# Altium PCB motherboard_2ch_arduino.PcbDoc
Units mm, origin at the board's own origin, x right, y up, seen from the top; angles counter-clockwise.
Board outline 155 x 100 mm, 2 copper layers (Top Layer, Bottom Layer); 52 components, 59 nets, 264 pads, 190 vias.
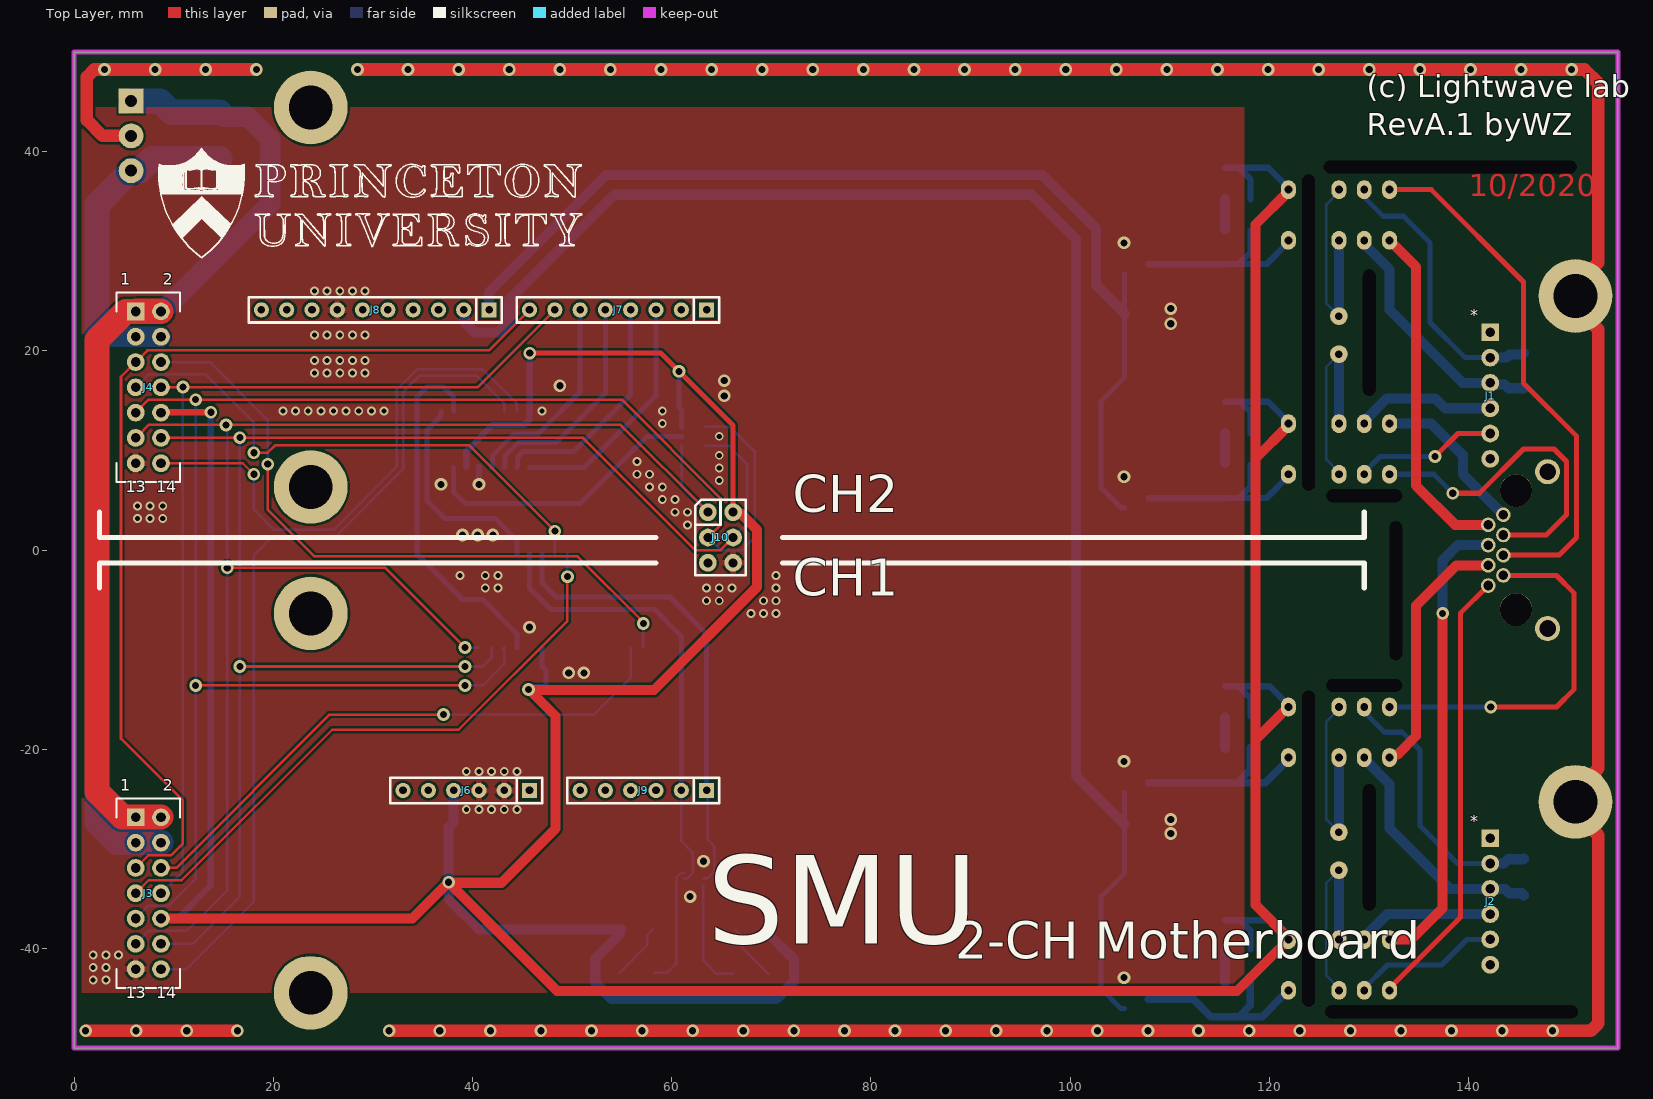
[diagram p0: Top Layer view]
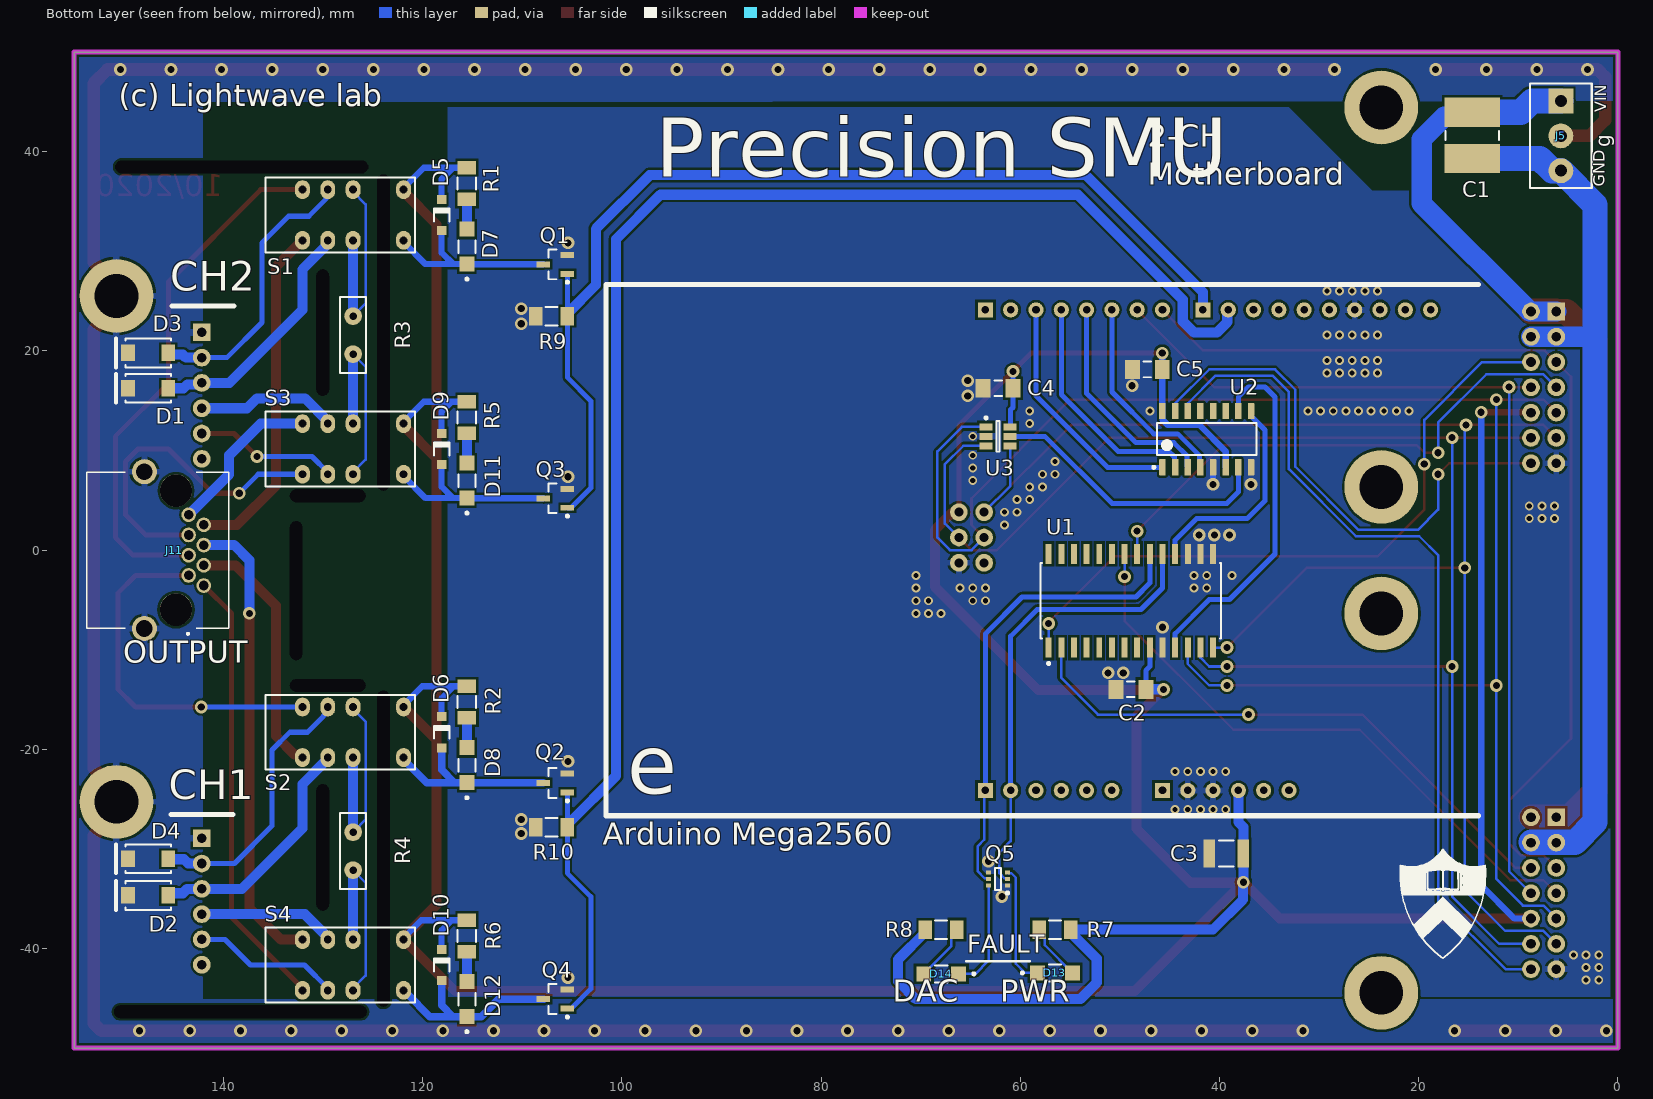
[diagram p1: Bottom Layer view, seen from below]
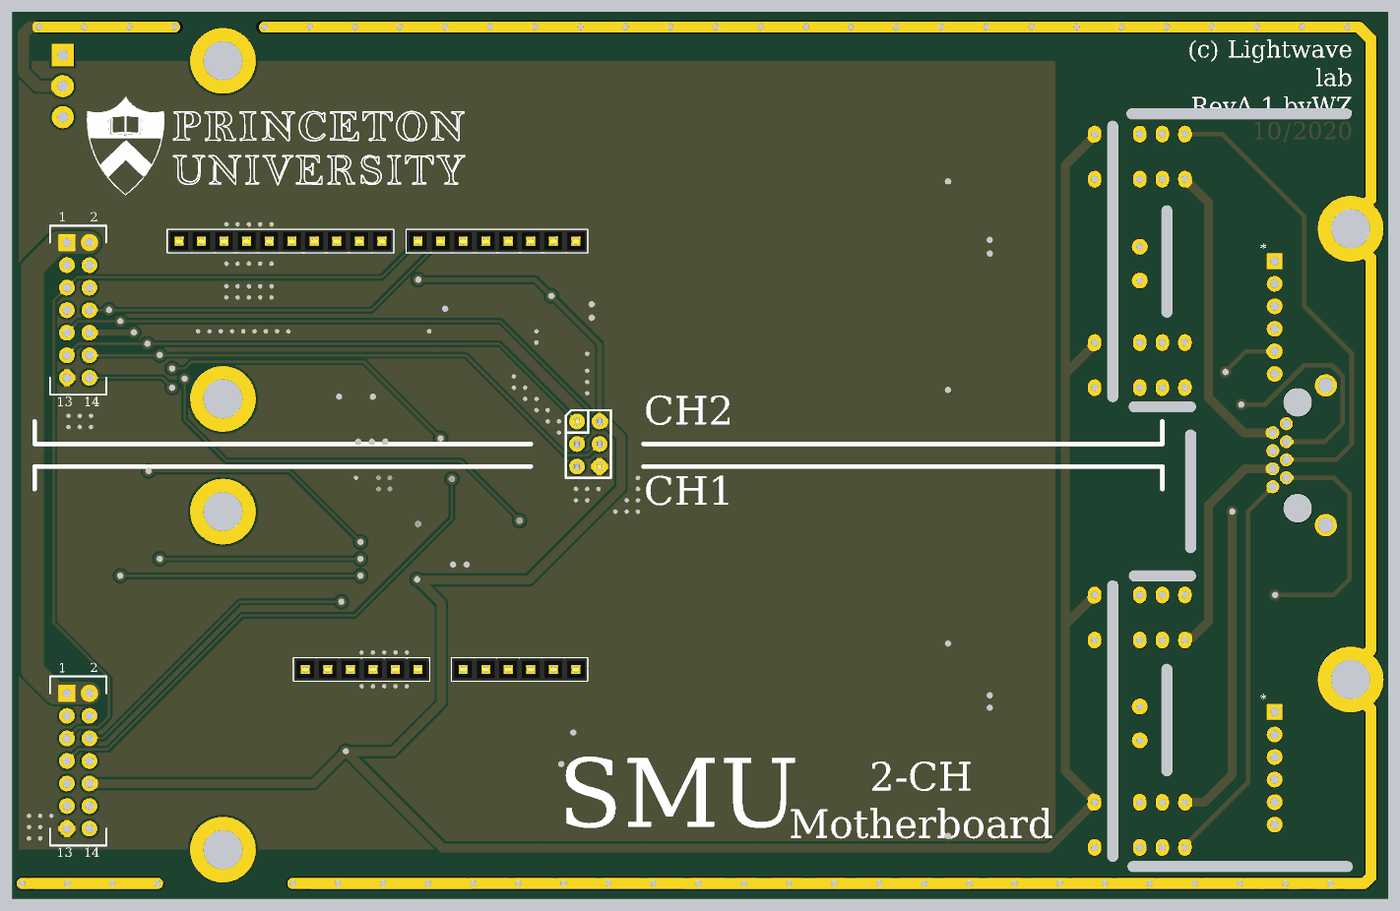
[diagram p2: 3D render of the assembled board from above, using the file's embedded part models]

## Layer stack, top to bottom
Top Solder: solder mask 0.0102, Solder Resist, Dk 3.5
Top Layer: signal copper 0.0356
Dielectric 1: dielectric 0.32, FR-4, Dk 4.8
Bottom Layer: signal copper 0.0356
Bottom Solder: solder mask 0.0102, Solder Resist, Dk 3.5

## Board outline
0,-50 0,50 155,50 155,-50

## Design rules (kind name [scope] priority, off if disabled: settings)
BoardOutlineClearance [All] p1: gap=0.381 ignorepadtopadclearanceinfootprint=FALSE
Clearance [All] p1: gap=0.152 ignorepadtopadclearanceinfootprint=FALSE except(0: Arc-Hole Track-Hole SMDPad-Hole THPad-Hole Via-Hole Fill-Hole Poly-Hole Region-Hole Text-Hole; 0.254: Track-Poly SMDPad-Poly THPad-Poly THPad-Region Via-Poly Fill-Poly Poly-Poly)
ComponentClearance [All] p1: gap=0.025 collisioncheckmode=3 verticalgap=0.025 showdistances=FALSE
DiffPairsRouting [All] p1: maxlimit=10 minlimit=0.152 mostfreqgap=0.203 toplayer_minwidth=0.152 toplayer_maxwidth=0.381 toplayer_prefwidth=0.203 bottomlayer_minwidth=0.152 bottomlayer_maxwidth=0.381 bottomlayer_prefwidth=0.203 maxuncoupledlength=12.7
HoleSize [All] p1: absolutevalues=TRUE maxlimit=6.731 minlimit=0.33 maxpercent=80.000 minpercent=20.000
HoleToHoleClearance [All] p1: gap=0.254 allowstackedmicrovias=FALSE
MinimumAnnularRing [All] p1: minimumring=0.178
MinimumSolderMaskSliver [All] p1: minsoldermaskwidth=0
PlaneClearance [All] p1: clearance=0.254
PlaneConnect [All] p1: planeconnectstyle=Direct reliefexpansion=0.406 reliefentries=4 reliefconductorwidth=0.152 reliefairgap=0.152
PolygonConnect [All] p1: thpad.connectstyle=Relief thpad.reliefconductorwidth=0.635 thpad.reliefentries=4 thpad.polygonreliefangle="90 Angle" thpad.airgapwidth=0.254 smdpad.connectstyle=Direct smdpad.reliefconductorwidth=0.203 smdpad.reliefentries=4 smdpad.polygonreliefangle="90 Angle" smdpad.airgapwidth=0.152 via.connectstyle=Direct via.reliefconductorwidth=0.203 via.reliefentries=4 via.polygonreliefangle="90 Angle" via.airgapwidth=0.152
RoutingCorners [All] p1: cornerstyle=45-Degree minsetback=1.25 maxsetback=1.25
RoutingVias [All] p1: holewidth=0.381 width=0.762 viastyle="Through Hole" minholewidth=0.33 minwidth=0.686 maxholewidth=2.54 maxwidth=2.896
SilkToSilkClearance [All] p1: silktosilkclearance=0
SilkToSolderMaskClearance [IsPad] p1: minsilkscreentomaskgap=0.152 clearancetoexposedcopper=TRUE
SolderMaskExpansion [All] p1: expansion=0.075 istentingtop=FALSE
Width [All] p1: maxlimit=10.16 minlimit=0.152 preferedwidth=0.203
20 further rules are at their usual default settings.

## Components (designator, comment, footprint, x,y, rotation, side; value= is the part's Value field where it differs from the comment)
C1 "KRM55TR71H226MH01L" CAPC6050X50M 14.605,41.656 r90 bottom
C2 "C1206C104J3GACAUTO" FP-C1206C-EB-IPC_A 48.895,-13.97 r180 bottom value="0.10 μF"
C3 "1210YD107MAT2A" MURA-1210_H_2.7_M 39.319,-30.48 r180 bottom
C4 "C1206C104J3GACAUTO" FP-C1206C-EB-IPC_A 62.23,16.256 r0 bottom value="0.10 μF"
C5 "C1206C104J3GACAUTO" FP-C1206C-EB-IPC_A 47.244,18.161 r180 bottom value="0.10 μF"
D1 "SMAJ33CA-TR" STM-SMA-2_V 147.574,16.256 r0 bottom
D2 "SMAJ33CA-TR" STM-SMA-2_V 147.574,-34.671 r0 bottom
D3 "SMAJ33CA-TR" STM-SMA-2_V 147.574,19.812 r0 bottom
D4 "SMAJ33CA-TR" STM-SMA-2_V 147.574,-30.988 r0 bottom
D5 "1N4148W-7-F" DIOD-SOD123-2_V 118.11,33.655 r90 bottom
D6 "1N4148W-7-F" DIOD-SOD123-2_V 118.11,-18.288 r90 bottom
D7 "LTST-C150KGKT" FP-LTST-C150KGKT-MFG 115.57,30.48 r90 bottom
D8 "LTST-C150KGKT" FP-LTST-C150KGKT-MFG 115.57,-21.59 r90 bottom
D9 "1N4148W-7-F" DIOD-SOD123-2_V 118.11,10.16 r90 bottom
D10 "1N4148W-7-F" DIOD-SOD123-2_V 118.11,-41.656 r90 bottom
D11 "LTST-C150KGKT" FP-LTST-C150KGKT-MFG 115.57,6.985 r90 bottom
D12 "LTST-C150KGKT" FP-LTST-C150KGKT-MFG 115.57,-45.085 r90 bottom
D13 "LTST-C150KGKT" FP-LTST-C150KGKT-MFG 56.515,-42.443 r180 bottom
D14 "LTST-C150KGKT" FP-LTST-C150KGKT-MFG 67.945,-42.545 r0 bottom
J1 "5-146276-6" SMUIO 142.19,21.87 r0 top locked
J2 "5-146276-6" SMUIO 142.19,-28.93 r0 top
J3 "5-146252-7" DATAIO 6.175,-26.833 r0 top locked
J4 "5-146252-7" DATAIO 6.175,23.967 r0 top locked
J5 "1984620" 1984620 5.715,41.6 r270 bottom
J6 "POWER" "Header 6x1 8.5mm" 45.72,-24.13 r180 top
J7 "IOL" "Header 8x1 8.5mm" 63.5,24.13 r180 top
J8 "IOH" "Header 10x1 8.5mm" 41.656,24.13 r180 top
J9 "AD" "Header 6x1 8.5mm" 63.5,-24.13 r180 top
J10 "ICSP" ICSP 63.627,3.81 r0 top
J11 "SS-60300-004" BEL_SS-60300-004 144.78,0 r270 bottom
Q1 "2N7002" INF-PG-SOT23_M 106.68,28.702 r0 bottom
Q2 "2N7002" INF-PG-SOT23_M 106.68,-23.368 r0 bottom
Q3 "2N7002" INF-PG-SOT23_M 106.68,5.207 r0 bottom
Q4 "2N7002" INF-PG-SOT23_M 106.68,-45.085 r0 bottom
Q5 "MBT3904DW1T1G" ONSC-SOT-363-6-419B-02_W_V 62.23,-33.02 r0 bottom
R1 "RN73R2BTTD1001B25" FP-RC3216-IPC_A 115.57,36.83 r90 bottom
R2 "RC3216J102CS" FP-RC3216-IPC_A 115.57,-15.24 r90 bottom
R3 "Y1453500R000V9L" Y1453500R000V9L 127,21.59 r90 bottom
R4 "Y1453500R000V9L" Y1453500R000V9L 127,-30.226 r90 bottom
R5 "RC3216J102CS" FP-RC3216-IPC_A 115.57,13.335 r90 bottom
R6 "RC3216J102CS" FP-RC3216-IPC_A 115.57,-38.735 r90 bottom
R7 "RC3216J102CS" FP-RC3216-IPC_A 56.515,-38.1 r0 bottom
R8 "RC3216J102CS" FP-RC3216-IPC_A 67.945,-38.1 r0 bottom
R9 "RN73H2BTTD1002B10" FP-RC3216-IPC_A 107.061,23.495 r180 bottom
R10 "RN73H2BTTD1002B10" FP-RC3216-IPC_A 107.061,-27.813 r180 bottom
S1 "G6S-2 DC5" EE2-5NU 128.27,33.655 r0 bottom
S2 "G6S-2 DC5" EE2-5NU 128.27,-18.288 r0 bottom
S3 "G6S-2 DC5" EE2-5NU 128.27,10.16 r0 bottom
S4 "G6S-2 DC5" EE2-5NU 128.27,-41.656 r0 bottom
U1 "MCP23S17T-E/SO" FP-C04-052-MFG 48.895,-5.08 r90 bottom
U2 "CD74HC138M" D0016A_M 41.275,11.145 r90 bottom
U3 "25AA02E48T-I/OT" SOT-23-OT6_M 62.23,11.43 r180 bottom

## Footprints (in the part's own frame and the unit in brackets; to place one, negate y for a bottom-side part, rotate by r counter-clockwise, add the part's x,y. Pads: shape width x height; smd on the part's side, far side on the other; paste and mask are expansions set on the pad)
1984620 [mm]
  rect 2.5x2.5 hole 1.2: 1(-3.5,0)
  round 2.5 hole 1.2: 2(0,0) 3(3.5,0)
  silkscreen extent -5.25,-3.1 5.25,3.1
BEL_SS-60300-004 [mil]
  round 58 hole 38: 1(100,50) 2(140,110) 3(60,110) 4(-20,110) 5(20,50) 6(-60,50) 7(-140,50) 8(-100,110)
  round 99 hole 66: S1(-310,-125) S2(310,-125)
  round 128 hole 128 unplated: ""(-235,0) ""(235,0)
  silkscreen extent -308,-353 335,208
CAPC6050X50M [mm] "Chip Capacitor, 2-Leads, Body 6.00x5.00mm, IPC Low Density"
  rect 2.95x5.6 smd: 1(-2.325,0) 2(2.325,0)
  silkscreen extent -0.45,-2.7 0.45,2.7, body extent -3.25,-2.75 3.25,2.75, height 5
D0016A_M [mm] "SOIC, 16-Leads, Body 10x4mm, Pitch 1.27mm, IPC Low Density"
  rrect15% 1.65x0.65 smd: 1(-2.825,4.445) 2(-2.825,3.175) 3(-2.825,1.905) 4(-2.825,0.635) 5(-2.825,-0.635) 6(-2.825,-1.905) 7(-2.825,-3.175) 8(-2.825,-4.445) 9(2.825,-4.445) 10(2.825,-3.175) 11(2.825,-1.905) 12(2.825,-0.635) 13(2.825,0.635) 14(2.825,1.905) 15(2.825,3.175) 16(2.825,4.445)
  silkscreen extent -2.95,-5 1.6,5.45, body extent -3,-4.95 3,4.95, height 1.59
DATAIO [mil]
  rect 70x70 hole 38: 1(0,0)
  round 70 hole 38: 2(100,0) 3(0,-100) 4(100,-100) 5(0,-200) 6(100,-200) 7(0,-300) 8(100,-300) 9(0,-400) 10(100,-400) 11(0,-500) 12(100,-500) 13(0,-600) 14(100,-600)
  silkscreen extent -75,-675 175,75
DIOD-SOD123-2_V [mm] "SOD123, 2-Leads, Body 2.7x1.55mm, Height 1.45mm"
  rect 0.9x0.95 smd: 1(-1.575,0) 2(1.575,0)
  silkscreen extent -0.64,-0.83 0.64,0.77, body extent -1.35,-0.77 1.35,0.77, height 1.45
EE2-5NU [mm]
  oval 1.5x1.9 hole 0.8: 1(-6.35,2.54) 3(-1.27,2.54) 4(1.27,2.54) 5(3.81,2.54) 8(3.81,-2.54) 9(1.27,-2.54) 10(-1.27,-2.54) 12(-6.35,-2.54)
  silkscreen extent -7.5,-3.75 7.5,3.75, body extent -7.5,-3.75 7.5,3.75, height 9.4
FP-C04-052-MFG [mm]
  rect 2x0.6 smd paste+0 mask+0: 1(-4.7,8.255) 2(-4.7,6.985) 3(-4.7,5.715) 4(-4.7,4.445) 5(-4.7,3.175) 6(-4.7,1.905) 7(-4.7,0.635) 8(-4.7,-0.635) 9(-4.7,-1.905) 10(-4.7,-3.175) 11(-4.7,-4.445) 12(-4.7,-5.715) 13(-4.7,-6.985) 14(-4.7,-8.255) 15(4.7,-8.255) 16(4.7,-6.985) 17(4.7,-5.715) 18(4.7,-4.445) 19(4.7,-3.175) 20(4.7,-1.905) 21(4.7,-0.635) 22(4.7,0.635) 23(4.7,1.905) 24(4.7,3.175) 25(4.7,4.445) 26(4.7,5.715) 27(4.7,6.985) 28(4.7,8.255)
  silkscreen extent -6.42,-9.05 3.8,9.05, body extent -3.8,-9.05 3.8,9.05, height 2.65
FP-C1206C-EB-IPC_A [mm]
  rect 1.505x1.906 smd paste+0 mask+0: 1(-1.501,0) 2(1.501,0)
  silkscreen extent -0.37,-0.8 0.37,0.8, body extent -1.6,-0.8 1.6,0.8, height 0.88
FP-LTST-C150KGKT-MFG [mm]
  rect 1.5x1.5 smd paste+0 mask+0: 1(-1.75,0) 2(1.75,0)
  silkscreen extent -3.4,-0.85 0.63,0.85, body extent -1.6,-0.8 1.6,0.8, height 1.1
FP-RC3216-IPC_A [mm]
  rect 1.355x1.858 smd paste+0 mask+0: 1(-1.576,0) 2(1.576,0)
  silkscreen extent -0.6,-0.93 0.6,0.93, body extent -1.6,-0.8 1.6,0.8, height 0.65
"Header 6x1 8.5mm" [mil] "Stackable 6 pin header"
  rect 60x60 hole 30: 1(0,0)
  round 60 hole 30: 2(100,0) 3(200,0) 4(300,0) 5(400,0) 6(500,0)
  silkscreen extent -50,-50 550,50, body extent -50,-50 550,50, height 335
"Header 8x1 8.5mm" [mil] "Stackable 8 pin header"
  rect 60x60 hole 30: 1(0,0)
  round 60 hole 30: 2(100,0) 3(200,0) 4(300,0) 5(400,0) 6(500,0) 7(600,0) 8(700,0)
  silkscreen extent -50,-50 750,50, body extent -50,-50 750,50, height 335
"Header 10x1 8.5mm" [mil] "Stackable 10 pin header"
  rect 60x60 hole 30: 1(0,0)
  round 60 hole 30: 2(100,0) 3(200,0) 4(300,0) 5(400,0) 6(500,0) 7(600,0) 8(700,0) 9(800,0) 10(900,0)
  silkscreen extent -50,-50 950,50, body extent -50,-50 950,50, height 335
ICSP [mil]
  round 70 hole 35.43: 1(0,0) 2(100,0) 3(0,-100) 4(100,-100) 5(0,-200) 6(100,-200)
  silkscreen extent -50,-250 150,50, body extent -50,-250 150,50, height 485
INF-PG-SOT23_M [mm] "SOT23, 3-Leads, Body 2.9x1.3mm, Pitch 0.95mm, IPC Low Density"
  rect 1.35x0.6 smd: 1(-1.2,0.95) 2(-1.2,-0.95) 3(1.2,0)
  silkscreen extent -1.32,-1.5 0.7,1.92, body extent -0.7,-1.5 0.7,1.5, height 1.1
MURA-1210_H_2.7_M [mm] "Chip Capacitor, 2-Leads, Body 3.5x2.7mm, IPC Low Density"
  rect 1.15x2.8 smd: 1(-1.725,0) 2(1.725,0)
  silkscreen extent -0.75,-1.3 0.75,1.3, body extent -1.75,-1.35 1.75,1.35, height 2.7
ONSC-SOT-363-6-419B-02_W_V [mm] "SOT23, 6-Leads, Body 2x1.25mm, Pitch 0.65mm"
  rect 0.5x0.4 smd: 1(-0.95,0.65) 2(-0.95,0) 3(-0.95,-0.65) 4(0.95,-0.65) 5(0.95,0) 6(0.95,0.65)
  silkscreen extent -1.07,-1.1 0.3,1.52, body extent -0.63,-1 0.63,1, height 1.1
SMUIO [mil]
  rect 70x70 hole 38: 1(0,0)
  round 70 hole 38: 2(0,-100) 3(0,-200) 4(0,-300) 5(0,-400) 6(0,-500)
SOT-23-OT6_M [mm] "SOT23, 6-Leads, Body 2.9x1.7mm, Pitch 0.95mm, Lead Span 2.8mm, IPC Low Density"
  rect 1.3x0.7 smd: 1(-1.2,0.95) 2(-1.2,0) 3(-1.2,-0.95) 4(1.2,-0.95) 5(1.2,0) 6(1.2,0.95)
  silkscreen extent -1.33,-1.55 0.15,1.97, body extent -0.9,-1.55 0.9,1.55, height 1.45
STM-SMA-2_V [mm] "Diode, 2-Leads, Body 4.6x2.9mm"
  rect 1.4x1.64 smd: 1(-2.015,0) 2(2.015,0)
  silkscreen extent -2.3,-1.45 3.21,1.45, body extent -2.3,-1.45 2.3,1.45, height 2.59
Y1453500R000V9L [mil]
  round 70 hole 30: 1(-75,0) 2(75,0)
  silkscreen extent -150,-52 150,52, body extent -150,-53 150,53, height 325

## Part data
C1: library part CAP22uF
C2 C4 C5: library part CMP-03020-020888-1, "CAP CER 0.1UF 25V C0G/NP0 1206", Capacitance="0.10 μF", Manufacturer=KEMET, Package=C1206C-EB, Temperature="-55°C to +150°C", Temperature Characteristic=C0G, Temperature Coefficient=15%, Temperature Range High=+150°C, Temperature Range Low=-55°C, Tolerance=0.05, Voltage Rating="25 V", Automotive=Yes, Automotive Grade="Grade 0", Category=Cap, ComponentLink2Description=Datasheet, ComponentLink2URL=https://content.kemet.com/datasheets/KEM_C1007_X8R_ULTRA_150C_SMD.pdf, Device Class L1="Passive Components", Device Class L2=Capacitors, Device Class L3="Ceramic Capacitors", Digikey Description="CAP CER 0.1UF 25V C0G/NP0 1206", Height=0.88mm, Ipc Land Pattern Name=CAPC320160X78, Lead Free=Yes, Manufacturer Part Number=C1206C104J3GACAUTO, Material=Ceramic, Mouser Description="Multilayer Ceramic Capacitor, AEC-Q200 MLCC Series, 0.1 - F, - 5%, C0G / NP0, 25 V", Octopart=https://octopart.com/c1206c104j3gacauto-kemet-22570084, RoHS=TRUE
C3: library part CMP-2000-06362-1, "Cap Ceramic, 47 uF, +/- 10%, -55 to 85 degC, 2-Pin SMD (1210), RoHS, Tape and Reel", Capacitance=47µF, Manufacturer=Murata, Operating Temperature=-55°C~85°C, Package / Case=1210(3225Metric), Package Description="2-Pin Surface Mount Device, Body 3.2 x 2.5 mm", Package Reference=1210, Ratings=-, Standard Package=1, Temperature Coefficient=X5R, Tolerance=±10%, Voltage - Rated=16V, Applications=GeneralPurpose, Catalog Drawings=GRMSeries_1210_2.5, Category=Capacitors, Datasheet URL=http://psearch.en.murata.com/capacitor/product/GRM32ER61C476KE15%23.pdf, Datasheet Version=04/2016, Family=CeramicCapacitors, Features=-, Height - Seated (Max)=-, Lead Spacing=-, Lead Style=-, Manufacturer URL=http://www.murata.com/, Mounting Technology=SurfaceMount, Mounting Type=SurfaceMount,MLCC, Online Catalog=GRMSeries, Other Names=490-6539-6, Packaging=Digi-Reel®, Product Training Modules=High-CapMultilayerCeramicCapacitors, Series=GRM, Size / Dimension="0.126\"Lx0.098\"W(3.20mmx2.50mm)", Thickness (Max)="0.106\"(2.70mm)", Voltage Rating DC=16V
D1 D2 D3 D4: library part CMP-2000-05373-2, "Transil(TM) Diode, 33 A, 36.7 V, -55 to 150 degC, 2-Pin SMA, RoHS, Tape and Reel", Breakdown Voltage Min=36.7V, Clamping Voltage Vc Max=69.7V, Diode Case Style=DO-214AC, Manufacturer=STMicroelectronics, Package Description="2-Pin Surface Mount Device, Body 4.275 x 2.575 mm", Package Reference=SMA, Peak Pulse Current Ippm="7.5 /  / A", Peak Pulse Power Dissipation=400W, Power Dissipation Pd="400 /  / W", Reverse Stand-Off Voltage Vrwm=33V, Datasheet URL=http://www.st.com/st-web-ui/static/active/en/resource/technical/document/datasheet/CD00001333.pdf, Datasheet Version="Rev. 12, 07/2010", Manufacturer URL=http://www.st.com/, No. of Pins=2Pins, Package URL=http://www.st.com/st-web-ui/static/active/en/resource/technical/document/datasheet/CD00283518.pdf, Packaging=CutTape, Product Range=SMAJSeries, SVHC=NoSVHC(17-Dec-2015), TVS Polarity=Bidirectional
D5 D6 D9 D10: library part CMP-2000-04932-2, "Fast Switching Diode, 100 V, 0.15 A, -65 to 150 degC, 2-Pin?SOD123, RoHS, Tape and Reel", If - Forward Current=0.15A, Ir - Reverse Current=1uA, Manufacturer=DiodesIncorporated, Max Surge Current=2A, Maximum Operating Temperature=+150C, Minimum Operating Temperature=-65C, Operating Temperature Range=-65Cto+150C, Package / Case=SOD-123, Package Reference=SOD123-2, Peak Reverse Voltage=100V, Vf - Forward Voltage=1.25V, Brand=DiodesIncorporated, Configuration=Single, Datasheet URL=http://www.farnell.com/datasheets/1915529.pdf, Datasheet Version="Rev. 24-2, 10/2013", Factory Pack Quantity=3000, Height=1.25mm, Length=2.85mm, Manufacturer URL=http://www.diodes.com/, Mounting Style=SMD/SMT, Package URL=http://www.diodes.com/datasheets/ds18004.pdf, Packaging=Reel, Product=SwitchingDiodes, Product Category=Diodes-GeneralPurpose,Power,Switching, Recovery Time=4ns, RoHS=True, Series=1N4148, Type=SwitchingDiode, Unit Weight=0.000353oz, Width=1.7mm
D7 D8 D11 D12 D13 D14: library part CMP-22017-000010-1, "LED GREEN CLEAR 1206 SMD", Case Code (Imperial)=1206, Case Code (Metric)=3216, Color=Green, Forward Current=30mA, Forward Voltage=2V, Lens Color=Colorless, Max Operating Temperature=85°C, Min Operating Temperature=-55°C, Package Quantity=1, Power Dissipation=75mW, Reverse Voltage=5V, Test Current=20mA, Case/Package=1206, Depth=1.6mm, Dominant Wavelength=571nm, Height=1.1mm, Illumination Color=Green, Lead Free="Lead Free", Length=3.2mm, Lens Style=Diffused, Lens Transparency=Clear, Luminous Intensity=71mcd, Mount="Surface Mount", Number of Elements=1, Number of LEDs=1, Number of Pins=2, Packaging="Tape and Reel", Power Rating=75mW, Radiation Hardening=No, Viewing Angle=130°, Wavelength=574nm, Width=1.6mm
J1 J2: library part SMUIO
J3 J4: library part DATAIO
J5: library part POWERJACK
J6: Supplier Part Number 1=2699075, Supplier 1=Arrow, Supplier 2=Arrow, Supplier 3=Newark, Supplier 4=Digi-Key, Supplier Part Number 2=2699089, Supplier Part Number 3=11P8269, Supplier Part Number 4=SAM1198-06-ND
J7: Supplier Part Number 1=2698925, Supplier 1=Arrow, Supplier 2=Arrow, Supplier 3=Digi-Key, Supplier Part Number 2=2698940, Supplier Part Number 3=SAM1198-08-ND
J8: Supplier Part Number 1=2698789, Supplier 1=Arrow, Supplier 2=Arrow, Supplier 3=Digi-Key, Supplier Part Number 2=2698803S4475693N1004, Supplier Part Number 3=SAM1198-10-ND
J9: Supplier Part Number 1=52553843, Supplier 1=Arrow, Supplier 2=Arrow, Supplier 3=Digi-Key, Supplier 4=Newark, Supplier Part Number 2=2699089, Supplier Part Number 3=SAM1198-06-ND, Supplier Part Number 4=11P8269
J10: Supplier Part Number 1=SAM1185-03-ND, Supplier 1=Digi-Key, Supplier 2=Arrow, Supplier 3=Arrow, Supplier Part Number 2=2699340, Supplier Part Number 3=46091550
J11: "Modular Jack", Package="QFN-16 Stewart Connector", Availability=Unavailable, DigiKey-Purchase-URL=https://snapeda.com/shop?store=DigiKey&id=621521, MF="Stewart Connector", Mouser-Purchase-URL=https://snapeda.com/shop?store=Mouser&id=621521, MP=SS-60300-004, Price=None, SnapEDA_Link=https://www.snapeda.com/parts/SS-60300-004/Stewart%20Connector/view-part/621521/?ref=snap
Q1 Q2 Q3 Q4: library part CMP-1149-00026-1, "N-Channel OptiMOS Small-Signal-Transistor, 60 V VDS, 0.3 A ID, -55 to 150 degC, PG-SOT23, Reel, Green", Manufacturer=Infineon, ComponentLink1Description="Manufacturer URL", ComponentLink1URL=http://www.infineon.com/, ComponentLink2Description=Datasheet, ComponentLink2URL=http://www.infineon.com/dgdl/2N7002_Rev2.4.pdf?folderId=db3a3043156fd573011622e10b5c1f67&fileId=db3a304319bc939a0119c2a9461e79e6, ComponentLink3Description="Package Specification", ComponentLink3URL=http://www.infineon.com/dgdl/SOT23-Package_Overview.pdf?folderId=db3a30431936bc4b0119532290053c66&fileId=db3a30431936bc4b0119533468123c85, DatasheetVersion="Rev. 2.4", Green=TRUE, Halogen-free=TRUE, ID (max)="0.3Â A", IDpuls (max)="1.2Â A", Mounting Technology="Surface Mount", PackageDescription="3-Pin Small Outline Transistor Package, 2.9 x 1.3 mm Body, 0.95 mm Pitch", PackageReference=PG-SOT23, PackageVersion=Apr-08, Packing=Reel, PartNumber=2N7002, Ptot (max)="0.5Â W", QG="0.4Â nC", RDS (on) (max)="3,000 mOhm", RDS (on) (max) (@4.5V)="4,000 mOhm", RthJA (max)="250 K/W", VDS (max)="60 V", VGS(th) (max)="2.5Â V", VGS(th) (min)="1.5Â V"
Q5: library part CMP-1048-00877-1, "Dual General Purpose Transistors, 6-Pin SOT-363, Pb-Free, Tape and Reel", Manufacturer="On Semiconductor", ComponentLink1Description="Manufacturer URL", ComponentLink1URL=http://www.onsemi.com/, ComponentLink2Description=Datasheet, ComponentLink2URL=http://www.onsemi.com/pub_link/Collateral/MBT3904DW1T1-D.PDF, ComponentLink3Description="Package Specification", ComponentLink3URL=http://www.onsemi.com/pub_link/Collateral/NTJD4001N-D.PDF, DatasheetVersion="Rev. 9", fT Min (MHz)=300, IC Continuous (A)=0.2, Mounting Technology="Surface Mount", PackageDescription="6-Pin Small Outline Transistor, Body 2 x 1.25 mm, Pitch 0.65 mm", PackageReference=SOT-363-6-419B-02_W, PackageVersion="Rev. W, 01/2006", Packing="Tape and Reel", PartNumber=MBT3904DW1T1G, Polarity="Dual NPN", RoHS=TRUE
R1 R2 R5 R6 R7 R8: library part CMP-13261-001932-1, "Res Thick Film 1206 1kΩ 5% 0.25W ±100ppm/°C Molded SMD T/R", Case Code (Imperial)=1206, Case Code (Metric)=3216, Max Operating Temperature=155°C, Max Power Dissipation=250mW, Min Operating Temperature=-55°C, Resistance=1kR, Temperature Coefficient=100ppm/°C, Tolerance=5%, Voltage Rating (DC)=200V, Case/Package=1206, Composition="Thick Film", Contact Plating=Tin, Depth=1.6mm, Features="Moisture Resistant", Height=0.026inch, Lead Free="Lead Free", Length=0.126inch, Military Standard=Not, Number of Terminations=2, Packaging="Tape and Reel", Power Rating=250mW, Radiation Hardening=No, Width=0.063inch
R9 R10: library part CMP-13261-000768-1, "RES SMD 10K OHM 1% 1/4W 1206", Case Code (Imperial)=1206, Case Code (Metric)=3216, Max Operating Temperature=155°C, Max Power Dissipation=250mW, Min Operating Temperature=-55°C, Resistance=10kR, Temperature Coefficient=100ppm/°C, Tolerance=1%, Voltage Rating (DC)=200V, Case/Package=1206, Composition="Thick Film", Contact Plating=Tin, Depth=1.6mm, Features="Moisture Resistant", Height=0.026inch, Lead Free="Lead Free", Length=0.126inch, Military Standard=Not, Number of Terminations=2, Packaging="Tape and Reel", Radiation Hardening=No, Width=0.063inch
S1 S2 S3 S4: library part EE2-5NU
U1: library part CMP-06293-000003-1, "IC I/O EXPANDER SPI 16B 28SOIC", Case/Package=SOIC, Frequency=10MHz, Max Operating Temperature=125°C, Max Supply Voltage=5.5V, Min Operating Temperature=-40°C, Min Supply Voltage=4.5V, Nominal Supply Current=1mA, Package Quantity=1600, Power Dissipation=700mW, Interface=SPI, Lead Free="Lead Free", Max Frequency=10MHz, Mount="Surface Mount", Number of Bits=16, Number Of Channels=1, Number of I/Os=16, Number of Pins=28, Packaging="Tape and Reel", REACH SVHC="No SVHC"
U2: library part CMP-1633-00149-2, "High Speed CMOS Logic 3-to-8 Line Decoder Demultiplexer Inverting and Non-Inverting, D0016A, TUBE", F @ Nom Voltage(Max)(Mhz)=28, Generic Part Number=CD74HC138, ICC @ Nom Voltage(Max)(mA)=0.08, Manufacturer="Texas Instruments", Operating Temperature Range(C)="-55 to 125", Rating=Catalog, tpd @ Nom Voltage(Max)(ns)=30, Voltage(Nom)(V)=3.3,5, Bits(#)=8, Channels(#)=1, Code_JEDEC="MS-012 variation AC", Configuration=3：8, DatasheetVersion=SCHS147I, Function=Decoder/Demultiplexer, Input Type=LVTTL/CMOS, Output Drive (IOL/IOH)(Max)(mA)=5.2/-5.2, Output Type=CMOS, PackageReference=D0016A, Schmitt Trigger=No, Technology Family=HC, Type=Standard, VCC(Max)(V)=6, VCC(Min)(V)=2
U3: library part CMP-0165-00270-1, "2K SPI Bus Serial EEPROM with EUI-48 Node Identity, 6-Pin SOT-23, Industrial Temperature, Tape and Reel", Code_IPC=SOT26A-6, DatasheetVersion="revA, Dec-2008", PackageDescription="6-Lead Plastic Small Outline Transistor (OT) [SOT-23]", PackageReference=SOT-23-OT6, PackageVersion="revBB, Aug-2009"

## Free pads (board coordinates)
  round 7.4 hole 4.4 unplated: ""(23.749,-44.45) ""(23.749,-6.35) ""(23.749,6.35) ""(23.749,44.45)
  round 0 hole 1.27 slot 31.75 at 90 deg unplated: ""(123.952,-29.972) ""(123.952,21.844)
  round 0 hole 1.27 slot 7.62 at 0 deg unplated: ""(129.54,-13.589) ""(129.54,5.461)
  round 0 hole 1.27 slot 12.7 at 90 deg unplated: ""(130.048,-29.845) ""(130.048,21.844)
  round 0 hole 1.27 slot 13.97 at 90 deg unplated: ""(132.715,-4.064)
  round 0 hole 1.27 slot 25.4 at 0 deg unplated: ""(138.176,38.481) ""(138.303,-46.355)
  round 7.4 hole 4.4: ""(150.749,-25.273) ""(150.749,25.527)

## Via types
v1: diameter 0.889, hole 0.508, Top Layer to Bottom Layer, tented both sides, 86 vias
v2: diameter 1.27, hole 0.711, Top Layer to Bottom Layer, 57 vias
v3: diameter 1.27, hole 0.711, Top Layer to Bottom Layer, tented both sides, 47 vias

## Nets (pads, with @x,y where several pads share a name; then routed paths per layer and width w, separated by ;. In a path a pad name is that pad's centre, name@x,y a point inside that pad or via, vN(x,y) a via of type N, cw(c..) or ccw(c..) an arc to the next point about the centre after c; other vN are vias at no path point)
+5: C2.2 C3.2 C4.1 C5.2 D5.2 D6.2 D9.2 D10.2 J3.10 J4.10 J6.4 J10.2 R1.2 R2.2 R5.2 R6.2 R7.1 R8.2 S1.12 S2.12 S3.12 S4.12 U1.9 U2.6 U2.16 U3.6 | length 499.3
  Top Layer w0.508: J4.10 J4.10@8.751,13.843 ; v3(45.745,19.787) 58.903,19.787 v3(60.731,17.958) 66.167,12.522 J10.2
  Top Layer w0.635: J4.10@8.751,13.843 v3(13.716,13.843)
  Top Layer w1.016: J3.10 33.949,-36.993 37.567,-33.376 37.592,-33.376 v3(37.592,-33.35) v3@37.641,-33.399 ; v3(45.618,-13.995) 45.667,-14.044 v3@45.718,-14.044 ; J10.2 66.313,3.664 66.948,3.664 68.58,2.032 68.58,-3.683 58.219,-14.044 v3@45.718,-14.044 ; S2.12 121.92,-15.817 121.547,-16.19 121.478,-16.19 118.618,-19.05 ; S3.12 121.92,12.5 118.618,9.198 ; S1.12 121.92,35.995 118.618,32.693 118.618,9.198 ; v3@37.641,-33.399 48.507,-44.265 116.771,-44.265 121.627,-39.409 121.696,-39.409 121.92,-39.185 S4.12 121.92,-38.916 118.618,-35.614 118.618,-19.05 ; v3@37.641,-33.399 42.903,-33.399 48.336,-27.965 48.336,-16.662 v3@45.718,-14.044 ; 118.618,-19.05 118.618,9.198
  Bottom Layer w0.508: U1.9 46.99,-11.684 47.396,-12.09 47.396,-13.968 C2.2 ; v3(60.731,17.958) 60.731,16.258 C4.1 60.729,14.328 60.96,14.097 60.96,12.476 61.03,12.406 U3.6
  Bottom Layer w0.635: J3.10 10.378,-36.993 13.716,-33.655 v3(13.716,13.843) ; U2.6 39.37,9.906 42.037,12.573 45.212,12.573 45.72,13.081 U2.16 45.728,13.978 45.728,19.769 v3(45.745,19.787) ; R6.2 117.094,-37.159 ; R2.2 116.915,-13.664 ; R5.2 117.094,14.911 ; R1.2 116.967,38.406 ; D10.2 118.11,-38.175 117.094,-37.159 ; D6.2 118.11,-14.859 116.915,-13.664 ; D9.2 118.11,13.895 117.094,14.911 ; D5.2 118.11,37.263 116.967,38.406 ; S4.12 121.92,-38.916 120.163,-37.159 117.094,-37.159 ; S2.12 121.92,-15.548 120.036,-13.664 116.915,-13.664 ; S3.12 121.92,12.9 119.909,14.911 117.094,14.911 ; S1.12 121.92,36.395 119.909,38.406 116.967,38.406
  Bottom Layer w1.016: v3(37.592,-33.35) 37.641,-33.399 37.641,-35.101 40.64,-38.1 R7.1 54.77,-38.269 54.77,-38.575 52.324,-41.021 52.324,-43.434 53.975,-45.085 70.485,-45.085 72.263,-43.307 72.263,-41.094 69.521,-38.352 R8.2 ; v3@37.592,-33.313 37.592,-30.482 C3.2 ; C3.2@37.592,-30.427 37.592,-27.813 38.1,-27.305 J6.4 ; v3(45.618,-13.995) 45.618,-13.97 C2.2
BS: J7.6 U2.4 | length 20.9
  Bottom Layer w0.508: U2.4 41.981,8.391 41.981,9.469 44.196,11.684 46.609,11.684 50.8,15.875 J7.6
CS0: J7.3 U2.1 | length 24.3
  Bottom Layer w0.508: U2.1 51.246,8.32 58.42,15.494 J7.3
CS1: J7.4 U2.2 | length 23.5
  Bottom Layer w0.508: U2.2 44.521,8.391 44.521,9.342 45.085,9.906 50.165,9.906 55.88,15.621 J7.4
CS2: J7.5 U2.3 | length 22.3
  Bottom Layer w0.508: U2.3 43.251,8.391 43.251,9.469 44.577,10.795 48.387,10.795 53.34,15.748 J7.5
DADCS: J3.8 J4.8 J7.7 | length 94.5
  Top Layer w0.254: J4.8 40.477,16.347 J7.7
  Bottom Layer w0.254: J3.8 10.922,-32.246 v3(10.922,16.383)
DCLK: J3.9 J4.9 J10.3 U1.12 U3.1 | length 177.6
  Top Layer w0.254: J4.9 7.481,15.113 v3(12.192,15.113) 54.991,15.113 64.897,5.207 64.897,2.54 J10.3 ; v3(12.192,-13.589) v3(39.243,-13.589)
  Bottom Layer w0.254: J3.9 7.481,-35.687 9.525,-35.687 12.192,-33.02 v3(12.192,-13.589) v3(12.192,15.113) ; v3(39.243,-13.589) 41.021,-13.589 43.18,-11.43 43.18,-10.034 43.053,-9.907 U1.12 ; U3.1 65.852,12.38 68.326,9.906 68.326,1.27 67.056,0 64.897,0 J10.3
EARTH: D1.2 D2.2 D3.2 D4.2 J1.1 J2.1 J5.2 J11.S1 J11.S2 pad.@150.749,25.527 pad.@150.749,-25.273 | length 387.5
  Top Layer w0.508: v2(18.284,48.26) v2@18.49,48.26 ; v2@28.238,48.26 v2(28.444,48.26)
  Top Layer w1.27: v2(1.143,-48.26) v2(6.223,-48.26) v2(11.303,-48.26) v2(16.383,-48.26) ; J5.2 2.85,41.6 1.27,43.18 1.27,47.516 2.014,48.26 v2(3.044,48.26) v2(8.124,48.26) v2(13.204,48.26) v2(18.284,48.26) ; v2(28.444,48.26) v2(33.524,48.26) v2(38.604,48.26) v2(43.684,48.26) v2(48.764,48.26) v2(53.844,48.26) v2(58.924,48.26) v2(64.004,48.26) v2(69.084,48.26) v2(74.164,48.26) v2(79.244,48.26) v2(84.324,48.26) v2(89.404,48.26) v2(94.484,48.26) v2(99.564,48.26) v2(104.644,48.26) v2(109.724,48.26) v2(114.804,48.26) v2(119.884,48.26) v2(124.964,48.26) v2(130.044,48.26) v2(135.124,48.26) v2(140.204,48.26) v2(145.284,48.26) v2(150.364,48.26) 151.656,48.26 153.035,46.881 153.035,28.886 150.749,26.6 150.749,24.454 153.035,22.168 153.035,-21.914 150.749,-24.2 150.749,-26.346 153.035,-28.632 153.035,-47.516 152.291,-48.26 v2(148.463,-48.26) v2(143.383,-48.26) v2(138.303,-48.26) v2(133.223,-48.26) v2(128.143,-48.26) v2(123.063,-48.26) v2(117.983,-48.26) v2(112.903,-48.26) v2(107.823,-48.26) v2(102.743,-48.26) v2(97.663,-48.26) v2(92.583,-48.26) v2(87.503,-48.26) v2(82.423,-48.26) v2(77.343,-48.26) v2(72.263,-48.26) v2(67.183,-48.26) v2(62.103,-48.26) v2(57.023,-48.26) v2(51.943,-48.26) v2(46.863,-48.26) v2(41.783,-48.26) v2(36.703,-48.26) v2(31.623,-48.26)
FAULT1: J4.7 U1.21 | length 53.9
  Top Layer w0.254: v3(18.034,9.779) 19.431,9.779 20.193,10.541 39.624,10.541 v3(48.26,1.905)
  Bottom Layer w0.254: J4.7 7.481,17.653 13.208,17.653 18.034,12.827 v3(18.034,9.779) ; U1.21 v3(48.26,1.905)
FAULT2: J3.7 U1.22 | length 61.6
  Top Layer w0.254: J3.7 6.441,-34.453 6.441,-34.187 7.481,-33.147 10.795,-33.147 25.908,-18.034 38.608,-18.034 49.53,-7.112 v3(49.53,-2.667)
  Bottom Layer w0.254: v3(49.53,-2.667) U1.22
FAULTINT: J9.1 Q5.5 U1.20 | length 47.1
  Bottom Layer w0.254: Q5.5 63.253,-32.947 63.573,-32.947 64.262,-32.258 64.262,-29.718 63.627,-29.083 J9.1@63.627,-24.257
  Bottom Layer w0.508: U1.20 46.99,-3.302 48.387,-4.699 59.817,-4.699 63.5,-8.382 J9.1 J9.1@63.627,-24.257
GND: C2.1 C3.1 C4.2 C5.1 J3.13 J4.13 J6.2 J6.3 J8.7 J10.6 Q1.2 Q2.2 Q3.2 Q4.2 Q5.1 Q5.4 R9.1 R10.1 U1.10 U1.15 U1.16 U1.17 U2.5 U2.8 U3.2 | length 1.7
  Bottom Layer w0.635: v3(40.64,6.604) U2.5
  other v1: 1.905,-43.18 3.175,-43.18 1.905,-41.91 3.175,-41.91 1.905,-40.64 3.175,-40.64 4.445,-40.64 39.37,-26.035 40.64,-26.035 41.91,-26.035 43.18,-26.035 44.45,-26.035 39.37,-22.225 40.64,-22.225 41.91,-22.225 43.18,-22.225 44.45,-22.225 67.945,-6.35 69.215,-6.35 70.485,-6.35 63.5,-5.08 64.77,-5.08 69.215,-5.08 70.485,-5.08 41.275,-3.81 42.545,-3.81 63.5,-3.81 64.77,-3.81 66.04,-3.81 70.485,-3.81 38.735,-2.54 41.275,-2.54 42.545,-2.54 70.485,-2.54 61.595,2.54 6.35,3.175 7.62,3.175 8.89,3.175 60.325,3.81 61.595,3.81 6.35,4.445 7.62,4.445 8.89,4.445 59.055,5.08 60.325,5.08 57.785,6.35 59.055,6.35 64.77,6.985 56.515,7.62 57.785,7.62 64.77,8.255 56.515,8.89 64.77,9.525 64.77,11.43 59.055,12.7 20.955,13.97 22.225,13.97 23.495,13.97 24.765,13.97 26.035,13.97 27.305,13.97 28.575,13.97 29.845,13.97 31.115,13.97 46.99,13.97 59.055,13.97 24.13,17.78 25.4,17.78 26.67,17.78 27.94,17.78 29.21,17.78 24.13,19.05 25.4,19.05 26.67,19.05 27.94,19.05 29.21,19.05 24.13,21.59 25.4,21.59 26.67,21.59 27.94,21.59 29.21,21.59 24.13,26.035 25.4,26.035 26.67,26.035 27.94,26.035 29.21,26.035
  other v3: 105.41,-42.926 61.849,-34.798 63.195,-31.242 110.109,-28.448 110.109,-27.051 105.41,-21.209 49.657,-12.319 51.181,-12.319 45.72,-7.747 38.989,1.524 40.513,1.524 42.037,1.524 36.83,6.604 105.41,7.366 65.278,15.494 48.768,16.51 65.278,17.018 110.109,22.733 110.109,24.257 105.41,30.861
Hi_CH1: J11.3 S2.5 | length 26
  Top Layer w0.508: S2.5 S2.5@132.588,-20.828
  Top Layer w1.016: S2.5@132.304,-20.828 132.304,-20.535 132.881,-20.535 134.747,-18.669 134.747,-5.588 138.811,-1.524 J11.3
Hi_CH2: J11.8 S1.5 | length 34.7
  Top Layer w1.016: S1.5 132.08,31.046 132.453,30.673 132.522,30.673 134.747,28.448 134.747,6.477 138.684,2.54 J11.8
LDAC: J3.5 J4.5 J7.8 | length 99
  Top Layer w0.254: J3.5 7.435,-30.653 9.733,-30.653 10.922,-29.464 10.922,-25.146 4.699,-18.923 4.699,17.411 6.132,18.844 6.175,18.844 J4.5 7.354,20.066 41.656,20.066 J7.8
Lo_CH1: J11.4 S4.8 | length 46.8
  Top Layer w1.016: S4.8 134.239,-39.116 137.414,-35.941 v3(137.414,-6.35)
  Bottom Layer w1.016: v3(137.414,-6.35) 137.414,-1.016 138.938,0.508 J11.4
Lo_CH2: J11.7 S3.8 | length 16.3
  Bottom Layer w1.016: S3.8 136.271,12.7 139.446,9.525 139.446,7.62 J11.7
MemCS: U2.7 U3.5 | length 28.7
  Bottom Layer w0.508: U2.7 38.1,5.842 39.243,4.699 50.8,4.699 57.531,11.43 U3.5
MISO: J3.11 J4.11 J10.1 U1.14 U3.4 | length 156.8
  Top Layer w0.254: J4.11 6.441,11.267 6.441,11.533 7.481,12.573 v3(15.24,12.573) 54.864,12.573 J10.1 ; v3(15.367,-1.778) 31.242,-1.778 v3(39.243,-9.779)
  Bottom Layer w0.254: J4.11@5.933,11.025 5.933,11.267 J4.11 ; J3.11 7.481,-38.227 11.303,-38.227 15.367,-34.163 v3(15.367,-1.778) 15.367,12.446 v3(15.24,12.573) ; v3(39.243,-9.779) U1.14 U1.14 ; U3.4 61.03,6.407 J10.1
MONCS: U1.11 U2.10 | length 36.4
  Bottom Layer w0.508: U2.10 38.1,15.367 37.084,16.383 35.433,16.383 34.417,15.367 34.417,-0.381 38.989,-4.953 41.021,-4.953 44.45,-8.382 U1.11
MONRST: U1.18 U2.9 | length 21.6
  Bottom Layer w0.508: U2.9 36.83,13.47 35.433,12.073 35.433,4.953 37.211,3.175 42.291,3.175 44.45,1.016 U1.18
MOSI: J3.12 J4.12 J10.4 U1.13 U3.3 | length 158.1
  Top Layer w0.254: J4.12 51.09,11.267 62.357,0 64.897,0 J10.4 ; v3(16.637,-11.684) v3(39.243,-11.684)
  Bottom Layer w0.254: J3.12 11.902,-39.533 16.637,-34.798 v3(16.637,-11.684) v3(16.637,11.303) ; v3(39.243,-11.684) 41.021,-11.684 41.91,-10.795 U1.13 ; U3.3 65.72,10.48 67.564,8.636 67.564,2.667 J10.4
NetD1_1: D1.1 J1.3 S1.4 | length 24.8
  Bottom Layer w0.381: J1.3@142.012,16.79 J1.3
  Bottom Layer w1.016: S1.4 129.54,30.784 129.782,30.542 129.782,30.492 132.08,28.194 132.08,24.13 139.42,16.79 J1.3@142.012,16.79 ; J1.3 142.336,16.644 143.63,16.644 144.018,16.256 D1.1
NetD2_1: D2.1 J2.3 S2.4 | length 24.4
  Bottom Layer w1.016: S2.4 129.54,-20.955 132.08,-23.495 132.08,-27.94 138.15,-34.01 143.662,-34.01 144.107,-34.455 145.367,-34.455 145.559,-34.647 D2.1
NetD3_1: D3.1 J1.2 S1.9 | length 28.3
  Bottom Layer w0.508: S1.9 129.73,36.005 129.73,35.243 131.445,33.528 133.477,33.528 136.144,30.861 136.144,22.86 139.674,19.33 J1.2
  Bottom Layer w1.016: J1.2 143.79,19.33 144.094,19.634 145.381,19.634 D3.1
NetD4_1: D4.1 J2.2 S2.9 | length 27.5
  Bottom Layer w0.508: S2.9 129.54,-16.216 129.947,-16.624 129.947,-16.663 131.572,-18.288 133.35,-18.288 135.128,-20.066 135.128,-27.686 138.912,-31.47 J2.2
  Bottom Layer w1.016: J2.2 142.207,-31.453 143.553,-31.453 143.967,-31.039 145.508,-31.039 D4.1
NetD5_1: D5.1 D7.1 Q1.3 S1.1 | length 19
  Bottom Layer w0.635: Q1.3 115.542,28.702 D7.1 116.967,28.73 ; D5.1 118.11,29.873 116.967,28.73 ; S1.1 121.92,30.915 119.735,28.73 116.967,28.73
NetD6_1: D6.1 D8.1 Q2.3 S2.1 | length 19.2
  Bottom Layer w0.508: Q2.3 Q2.3@107.894,-23.354 ; D8.1@115.556,-23.354 D8.1
  Bottom Layer w0.762: Q2.3@107.894,-23.354 D8.1@115.556,-23.354 ; D8.1 116.84,-23.34 ; D6.1 118.11,-22.07 116.84,-23.34 ; S2.1 121.92,-21.028 119.608,-23.34 116.84,-23.34
NetD7_2: D7.2 R1.1 | length 3
  Bottom Layer w1.016: D7.2 R1.1
NetD8_2: D8.2 R2.1 | length 3
  Bottom Layer w1.016: D8.2 R2.1
NetD9_1: D9.1 D11.1 Q3.3 S3.1 | length 19
  Bottom Layer w0.635: Q3.3 107.894,5.221 115.556,5.221 D11.1 116.995,5.235 ; D9.1 118.11,6.35 116.995,5.235 ; S3.1 121.92,7.422 119.733,5.235 116.995,5.235
NetD10_1: D10.1 D12.1 Q4.3 S4.1 | length 19.9
  Bottom Layer w0.762: Q4.3 112.395,-45.085 114.145,-46.835 D12.1 116.995,-46.835 ; D10.1 118.11,-45.72 116.995,-46.835 ; S4.1@121.579,-44.537 119.281,-46.835 116.995,-46.835 ; S4.1@121.579,-44.537 S4.1
NetD11_2: D11.2 R5.1 | length 3
  Bottom Layer w1.016: D11.2 R5.1
NetD12_2: D12.2 R6.1 | length 3
  Bottom Layer w1.016: D12.2 R6.1
NetD13_1: D13.1 Q5.3 | length 12.2
  Bottom Layer w0.254: D13.1 59.538,-42.443 60.452,-41.529 60.452,-32.893 60.902,-32.443 61.207,-32.443 Q5.3
NetD13_2: D13.2 R7.2 | length 5.7
  Bottom Layer w0.254: D13.2 57.54,-39.668 57.54,-38.65 R7.2
NetD14_1: D14.1 Q5.6 | length 11.2
  Bottom Layer w0.254: Q5.6 63.119,-33.731 63.168,-33.731 63.18,-33.743 63.18,-41.209 64.516,-42.545 D14.1
NetD14_2: D14.2 R8.1 | length 5.9
  Bottom Layer w0.254: R8.1 66.92,-38.65 66.92,-39.742 69.072,-41.894 69.072,-41.922 D14.2 D14.2@69.723,-42.545
NetJ1_4: J1.4 S3.9 | length 14.3
  Bottom Layer w1.016: S3.9 129.54,12.954 131.826,15.24 136.652,15.24 137.642,14.25 J1.4
NetJ1_5: J1.5 S3.4 | length 14.6
  Top Layer w0.508: v3(136.652,9.398) 136.779,9.398 136.779,9.525 138.964,11.71 J1.5
  Bottom Layer w0.508: S3.4@129.54,7.747 129.54,7.82 131.118,9.398 v3(136.652,9.398)
  Bottom Layer w1.016: S3.4 S3.4@129.633,7.713 ; J1.5@142.164,11.684 J1.5
NetJ2_4: J2.4 S4.9 | length 13.9
  Bottom Layer w1.016: S4.9 129.54,-38.862 131.852,-36.55 J2.4
NetJ2_5: J2.5 S4.4 | length 14.9
  Bottom Layer w0.508: S4.4 129.54,-43.996 131.88,-41.656 137.287,-41.656 139.853,-39.09 J2.5
NetR3_1: R3.1 S3.3 S3.10 | length 20.1
  Bottom Layer w0.254: S3.3 127,7.82 125.73,9.09 125.73,18.415 R3.1
  Bottom Layer w1.016: S3.10 R3.1
NetR3_2: R3.2 S1.3 S1.10 | length 21.4
  Bottom Layer w0.254: R3.2 125.73,24.765 125.73,34.725 127,35.995 S1.10
  Bottom Layer w1.016: R3.2 S1.3
NetR4_1: R4.1 S4.3 S4.10 | length 20.1
  Bottom Layer w0.254: S4.3 127,-43.996 125.73,-42.726 125.73,-33.401 R4.1
  Bottom Layer w1.016: S4.10 R4.1
NetR4_2: R4.2 S2.3 S2.10 | length 21.2
  Bottom Layer w0.254: R4.2@126.873,-28.321 126.873,-28.194 125.73,-27.051 125.73,-17.218 127,-15.948 S2.10
  Bottom Layer w1.016: R4.2@126.873,-28.321 R4.2 S2.3
PGND: C1.1 J3.3 J3.4 J4.3 J4.4 J5.3 | length 89.9
  Bottom Layer w2.032: 2.286,21.463 2.322,21.427 J4.3 J4.4
  Bottom Layer w2.54: J3.4@8.679,-29.337 4.318,-29.337 2.286,-27.305 2.286,21.463 2.286,34.671 J5.3 6.604,38.1 7.835,39.331 C1.1
PGOOD1: J4.6 U1.1 | length 67.2
  Top Layer w0.254: v3(19.431,8.636) 19.431,4.064 24.13,-0.635 50.546,-0.635 57.15,-7.239 v3(57.15,-7.366)
  Bottom Layer w0.254: J4.6 8.715,18.844 8.794,18.923 8.83,18.887 13.625,18.887 19.431,13.081 v3(19.431,8.636) ; U1.1 v3(57.15,-7.366)
PGOOD2: J3.6 U1.2 | length 58.1
  Top Layer w0.254: J3.6 10.251,-31.913 25.654,-16.51 v3(37.084,-16.51)
  Bottom Layer w0.254: v3(37.084,-16.51) 52.197,-16.51 55.88,-12.827 U1.2
POWERINT: J9.2 Q5.2 U1.19 | length 46
  Bottom Layer w0.254: J9.2 60.96,-29.21 62.103,-30.353 62.103,-32.436 61.592,-32.947 61.353,-32.947 Q5.2
  Bottom Layer w0.508: U1.19 45.72,-3.81 47.879,-5.969 58.293,-5.969 60.96,-8.636 J9.2
RL_CH1: J8.1 Q1.1 Q3.1 R9.2 | length 105.2
  Bottom Layer w0.508: Q3.1 105.105,4.257 103.124,6.238 103.124,14.986 105.485,17.347 R9.2 ; R9.2@105.483,23.749 Q1.1@105.483,27.749
  Bottom Layer w0.762: R9.2@105.483,23.749 105.483,23.498 R9.2
  Bottom Layer w1.016: J8.1 41.656,25.908 53.406,37.658 97.216,37.658 102.616,32.258 102.616,26.616 R9.2@105.483,23.749
RL_CH2: J8.2 Q2.1 Q4.1 R10.2 | length 156.6
  Bottom Layer w0.508: Q4.1 105.105,-46.035 105.059,-45.989 103.124,-44.054 103.124,-34.798 105.485,-32.437 R10.2 105.483,-27.81 105.483,-27.559 105.483,-24.321 Q2.1
  Bottom Layer w1.016: J8.2 39.213,24.033 39.213,22.89 40.259,21.844 42.545,21.844 43.688,22.987 43.688,25.146 54.229,35.687 96.139,35.687 100.584,31.242 100.584,-22.66 105.316,-27.392 R10.2@105.483,-27.559
SHi_CH1: J11.1 S2.8 | length 37
  Top Layer w0.508: v3(142.24,-15.748) 148.844,-15.748 150.622,-13.97 150.622,-4.318 148.844,-2.54 J11.1
  Bottom Layer w0.508: S2.8 v3(142.24,-15.748) ; J11.1 J11.1@143.764,-2.54
SHi_CH2: J11.5 S1.8 | length 53.4
  Top Layer w0.508: S1.8 132.08,36.068 132.207,36.195 136.271,36.195 145.542,26.924 145.542,16.764 150.876,11.43 150.876,1.27 149.098,-0.508 J11.5
SLo_CH1: J11.2 S4.5 | length 44.7
  Top Layer w0.508: S4.5 132.461,-43.815 132.461,-43.615 139.192,-36.884 139.192,-6.35 J11.2
SLo_CH2: J11.6 S3.5 | length 33.5
  Top Layer w0.508: v3(138.43,5.715) 141.097,5.715 145.542,10.16 148.59,10.16 149.86,8.89 149.86,3.556 147.828,1.524 J11.6
  Bottom Layer w0.508: S3.5 136.525,7.62 v3(138.43,5.715)
SS_CH1: J4.14 U2.15 | length 54
  Top Layer w0.254: J4.14 16.927,8.727 v3(18.034,7.62)
  Bottom Layer w0.254: v3(18.034,7.62) 18.034,4.064 20.066,2.032 26.035,2.032 32.385,8.382 32.385,16.129 34.417,18.161 41.021,18.161 44.45,14.732 U2.15
SS_CH2: J3.14 U2.14 | length 86
  Bottom Layer w0.254: J3.14 11.267,-42.073 18.034,-35.306 18.034,-0.508 19.939,1.397 26.289,1.397 33.02,8.128 33.02,15.875 34.671,17.526 40.386,17.526 43.18,14.732 U2.14
VINP: C1.2 J3.1 J3.2 J4.1 J4.2 J5.1 | length 100.4
  Top Layer w2.54: J3.2@8.679,-26.797 4.826,-26.797 2.286,-24.257 2.286,21.082 5.171,23.967 J4.1 6.186,23.978 8.704,23.978 J4.2
  Bottom Layer w2.032: J4.1 J4.2 8.854,23.967 19.685,34.798 19.685,41.275 17.438,43.522 15.064,43.522 C1.2
  Bottom Layer w2.54: J5.1 8.621,45.1 9.74,43.981 C1.2
pads on no net: J1.6 J2.6 J6.1 J6.5 J6.6 J7.1 J7.2 J8.3 J8.4 J8.5 J8.6 J8.8 J8.9 J8.10 J9.3 J9.4 J9.5 J9.6 J10.5 J11. U1.3 U1.4 U1.5 U1.6 U1.7 U1.8 U1.23 U1.24 U1.25 U1.26 U1.27 U1.28 U2.11 U2.12 U2.13

## Polygon pours and split planes (outlines as drawn)
EARTH on Bottom Layer "EARTH_L02_P000" (solid, remove dead copper, pour order 0): 0,-45.085 142.113,-45.085 142.113,44.985 0,45.113 0,49.53 154.94,49.53 154.94,-49.53 0,-49.53
GND on Bottom Layer "GND_L02_P002" (solid, remove dead copper, pour order 2): 0.762,36.068 24.638,36.068 33.02,44.45 117.475,44.45 117.475,-44.831 0.762,-44.831
no net on Top Overlay (solid): 17.091,37.861 cw(c6.701,37.861) 16.867,35.717 8.711,35.717 cw(c18.834,37.836) 8.492,37.836 cw(c18.834,37.836) 8.531,38.74 ccw(c9.626,42.374) 9.626,38.579 ccw(c9.626,42.374) 9.627,38.579 ccw(c9.647,42.263) 9.647,38.579 ccw(c9.647,42.263) 12.792,40.343 ccw(c15.935,42.261) 15.935,38.579 ccw(c15.935,42.261) 15.956,38.579 ccw(c15.958,42.35) 15.958,38.579 ccw(c15.958,42.35) 17.053,38.741 cw(c6.701,37.861)
no net on Top Overlay (solid): 15.778,32.701 cw(c6.595,37.846) 14.838,31.3 12.821,33.262 10.81,31.305 cw(c19.24,37.972) 9.87,32.708 12.821,35.543
no net on Top Overlay (none): 16.849,35.63 16.855,35.659 16.861,35.688 16.867,35.717 16.865,35.717 ccw(c6.699,37.859) 17.051,38.739 cw(c15.956,42.348) 15.953,38.577 cw(c15.933,42.26) 12.789,40.341 cw(c9.645,42.261) 9.625,38.577 cw(c9.624,42.372) 8.529,38.738 ccw(c18.831,37.834) 8.709,35.715 8.712,35.715 ccw(c18.973,37.879) 9.836,32.732 9.835,32.731 ccw(c19.206,37.995) 10.775,31.328 ccw(c19.27,38.049) 12.787,29.371 ccw(c6.297,38.089) 14.802,31.323 14.803,31.322 ccw(c6.489,37.898) 15.627,32.527 ccw(c0.469,41.559) 15.85,32.913 ccw(c7.808,37.336) 16.502,34.392 ccw(c6.043,38.005) 16.837,35.572
no net on Bottom Overlay (solid): 21.871,-32.499 cw(c11.481,-32.499) 21.648,-34.643 13.492,-34.643 cw(c23.614,-32.524) 13.272,-32.524 cw(c23.614,-32.524) 13.312,-31.62 ccw(c14.407,-27.986) 14.407,-31.781 ccw(c14.407,-27.986) 14.408,-31.781 ccw(c14.428,-28.097) 14.428,-31.781 ccw(c14.428,-28.097) 17.573,-30.017 ccw(c20.716,-28.099) 20.716,-31.781 ccw(c20.716,-28.099) 20.736,-31.781 ccw(c20.739,-28.01) 20.739,-31.781 ccw(c20.739,-28.01) 21.834,-31.619 cw(c11.481,-32.499)
no net on Bottom Overlay (solid): 20.558,-37.659 cw(c11.376,-32.514) 19.619,-39.06 17.602,-37.098 15.591,-39.055 cw(c24.021,-32.388) 14.651,-37.652 17.602,-34.817
no net on Bottom Overlay (none): 21.63,-34.73 21.636,-34.701 21.641,-34.672 21.648,-34.643 21.645,-34.643 ccw(c11.479,-32.501) 21.831,-31.621 cw(c20.737,-28.012) 20.734,-31.783 cw(c20.713,-28.1) 17.57,-30.019 cw(c14.426,-28.099) 14.405,-31.783 cw(c14.405,-27.988) 13.309,-31.621 ccw(c23.612,-32.526) 13.489,-34.645 13.492,-34.645 ccw(c23.754,-32.481) 14.617,-37.628 14.616,-37.629 ccw(c23.986,-32.365) 15.556,-39.032 ccw(c24.05,-32.311) 17.568,-40.989 ccw(c11.078,-32.271) 19.583,-39.037 19.583,-39.038 ccw(c11.27,-32.462) 20.408,-37.833 ccw(c5.249,-28.801) 20.631,-37.447 ccw(c12.589,-33.024) 21.282,-35.968 ccw(c10.824,-32.355) 21.618,-34.788
GND on Top Layer "GND_L01_P001" (solid, remove dead copper, pour order 1): 0.762,44.45 117.475,44.45 117.475,-44.45 0.762,-44.45

## Keep-outs
Keep-Out Layer:
  the board outline again, w0.508

## Other copper
Top Layer:
  text "10/2020" at 140.054,34.798 h3.81

## Silkscreen, mask and mechanical layers (free items; w line width, h text height)
Top Overlay:
  drawing of 2223 lines, arcs and shapes, not listed
  text "(c) Lightwave lab / RevA.1 byWZ" at 129.773,40.894 h3.81
  text "CH2" at 72.144,2.54 h6.35
  text "CH1" at 72.141,-5.842 h6.35
  text "2-CH Motherboard" at 88.49,-42.291 h6.35
  text "SMU" at 63.587,-42.418 h15.24
Bottom Overlay:
  drawing of 150 lines, arcs and shapes, not listed
  text "(c) Lightwave lab" at 150.537,43.815 h3.81
  text "2-CH / Motherboard" at 47.185,35.941 h3.81
  text "Precision SMU" at 96.592,35.56 h10.16
  text "CH2" at 145.358,25.019 h5.08
  text "OUTPUT" at 150.053,-12.065 h3.81
  text "CH1" at 145.487,-26.035 h5.08
  text "e" at 99.468,-26.416 h10.16
  text "Arduino Mega2560" at 101.917,-30.353 h3.81
  text "FAULT" at 65.341,-41.021 h3.05
  text "PWR" at 62.008,-46.101 h3.81
  text "DAC" at 72.814,-46.101 h3.81
Top Solder:
  lines w1.524: 1.143,-48.26 6.223,-48.26 11.303,-48.26 16.383,-48.26 ; 3.044,48.26 8.124,48.26 13.204,48.26 18.284,48.26 18.49,48.26 ; 28.238,48.26 28.444,48.26 33.524,48.26 38.604,48.26 43.684,48.26 48.764,48.26 53.844,48.26 58.924,48.26 64.004,48.26 69.084,48.26 74.164,48.26 79.244,48.26 84.324,48.26 89.404,48.26 94.484,48.26 99.564,48.26 104.644,48.26 109.724,48.26 114.804,48.26 119.884,48.26 124.964,48.26 130.044,48.26 135.124,48.26 140.204,48.26 145.284,48.26 150.364,48.26 151.656,48.26 153.035,46.881 153.035,28.886 150.749,26.6 150.749,24.454 153.035,22.168 153.035,-21.914 150.749,-24.2 150.749,-26.346 153.035,-28.632 153.035,-47.516 152.291,-48.26 148.463,-48.26 143.383,-48.26 138.303,-48.26 133.223,-48.26 128.143,-48.26 123.063,-48.26 117.983,-48.26 112.903,-48.26 107.823,-48.26 102.743,-48.26 97.663,-48.26 92.583,-48.26 87.503,-48.26 82.423,-48.26 77.343,-48.26 72.263,-48.26 67.183,-48.26 62.103,-48.26 57.023,-48.26 51.943,-48.26 46.863,-48.26 41.783,-48.26 36.703,-48.26 31.623,-48.26
Bottom Solder:
  lines w1.524: 1.143,-48.26 6.223,-48.26 11.303,-48.26 16.383,-48.26 ; 2.014,48.26 3.044,48.26 8.124,48.26 13.204,48.26 18.284,48.26 18.49,48.26 ; 28.238,48.26 28.444,48.26 33.524,48.26 38.604,48.26 43.684,48.26 48.764,48.26 53.844,48.26 58.924,48.26 64.004,48.26 69.084,48.26 74.164,48.26 79.244,48.26 84.324,48.26 89.404,48.26 94.484,48.26 99.564,48.26 104.644,48.26 109.724,48.26 114.804,48.26 119.884,48.26 124.964,48.26 130.044,48.26 135.124,48.26 140.204,48.26 145.284,48.26 150.364,48.26 151.656,48.26 153.035,46.881 153.035,28.886 150.749,26.6 150.749,24.454 153.035,22.168 153.035,-21.914 150.749,-24.2 150.749,-26.346 153.035,-28.632 153.035,-47.516 152.291,-48.26 148.463,-48.26 143.383,-48.26 138.303,-48.26 133.223,-48.26 128.143,-48.26 123.063,-48.26 117.983,-48.26 112.903,-48.26 107.823,-48.26 102.743,-48.26 97.663,-48.26 92.583,-48.26 87.503,-48.26 82.423,-48.26 77.343,-48.26 72.263,-48.26 67.183,-48.26 62.103,-48.26 57.023,-48.26 51.943,-48.26 46.863,-48.26 41.783,-48.26 36.703,-48.26 31.623,-48.26
Mechanical 1:
  lines w0.203: 0,-1.27 154.94,-1.27 ; 0,0 154.94,0 ; 0,1.27 154.94,1.27 ; 0,49.53 0,-49.53 154.94,-49.53 154.94,49.53 0,49.53 ; 0,49.53 0,49.53
  lines w0.508: 0,-26.67 0,26.67 101.6,26.67 101.6,-26.67 0,-26.67
Mechanical 15:
  lines w0.203: -1.27,0 1.27,0 ; 0,-1.27 0,1.27
  lines w0.254: -1.27,-26.67 1.27,-26.67 ; 0,-27.94 0,-25.4

## Text inside footprints (layer, text, board x,y; h text height)
J1: Top Overlay "*" at 140.172,22.632 h2.03
J2: Top Overlay "*" at 140.172,-28.168 h2.03
J3: Top Overlay "13" at 5.2,-45.375 h2.03; Top Overlay "14" at 8.221,-45.375 h2.03; Top Overlay "2" at 8.894,-24.547 h2.03; Top Overlay "1" at 4.601,-24.547 h2.03
J4: Top Overlay "14" at 8.221,5.425 h2.03; Top Overlay "1" at 4.601,26.253 h2.03; Top Overlay "2" at 8.894,26.253 h2.03; Top Overlay "13" at 5.2,5.425 h2.03
J5: Bottom Overlay "VIN" at 0.762,43.952 h2.03 r270; Bottom Overlay "GND" at 0.889,36.476 h2.03 r270; Bottom Overlay "g" at 0.254,40.468 h2.54 r270